# EAGLE board Merge (EAGLE 9.5.1), part 1 of 2
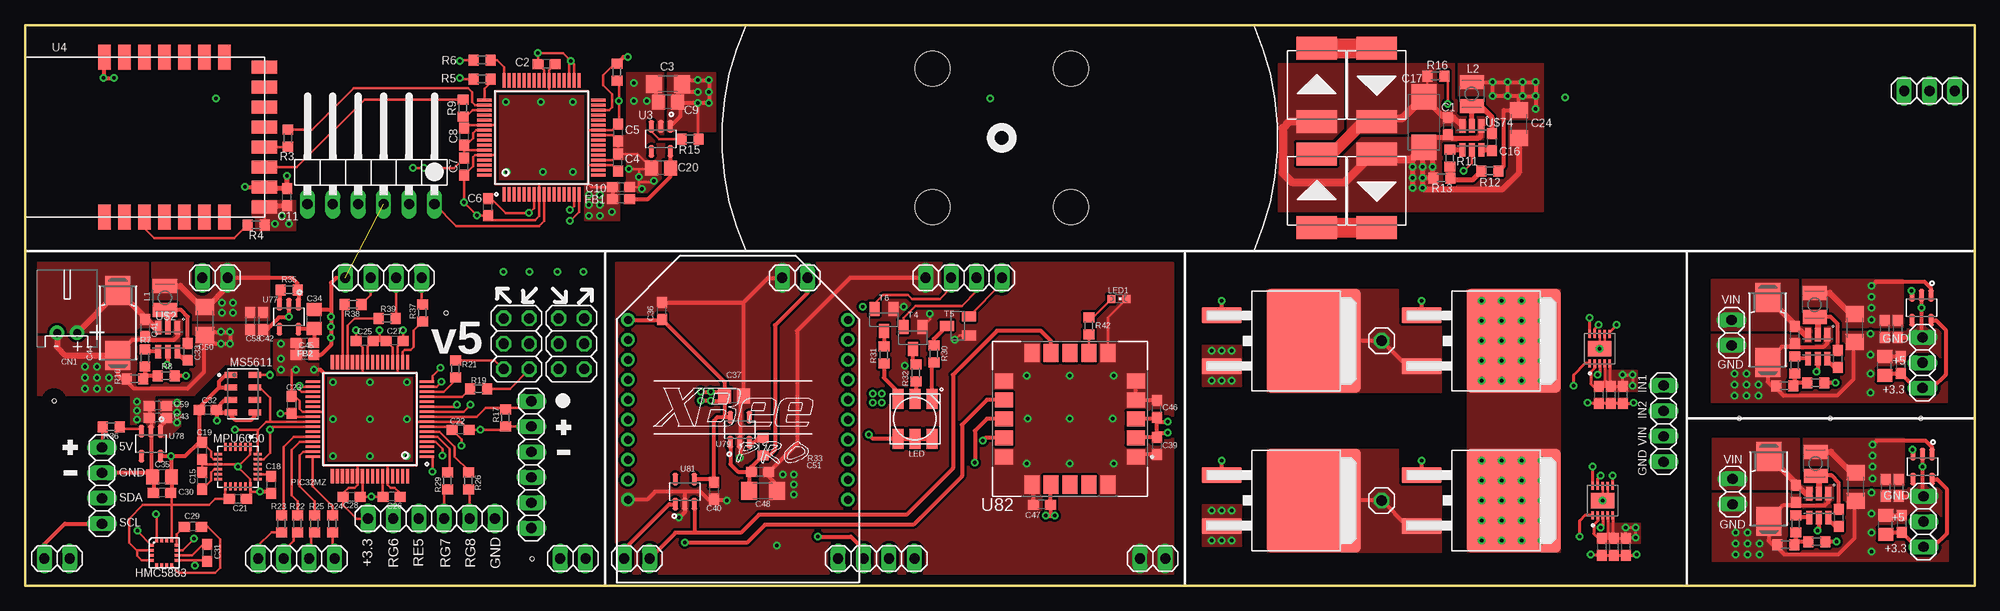
[diagram p0: board, top side]
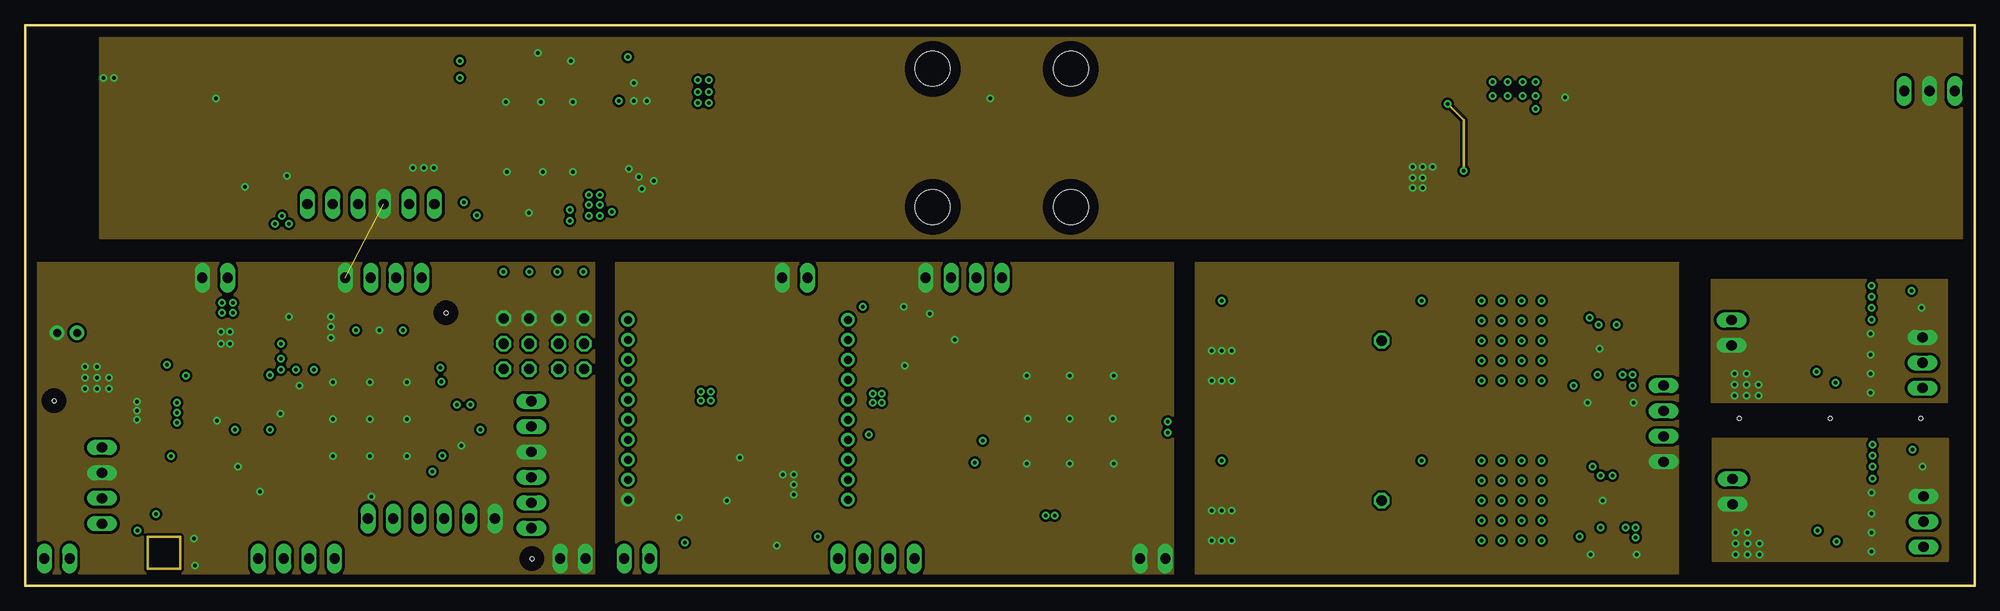
[diagram p1: board, inner layer GND]
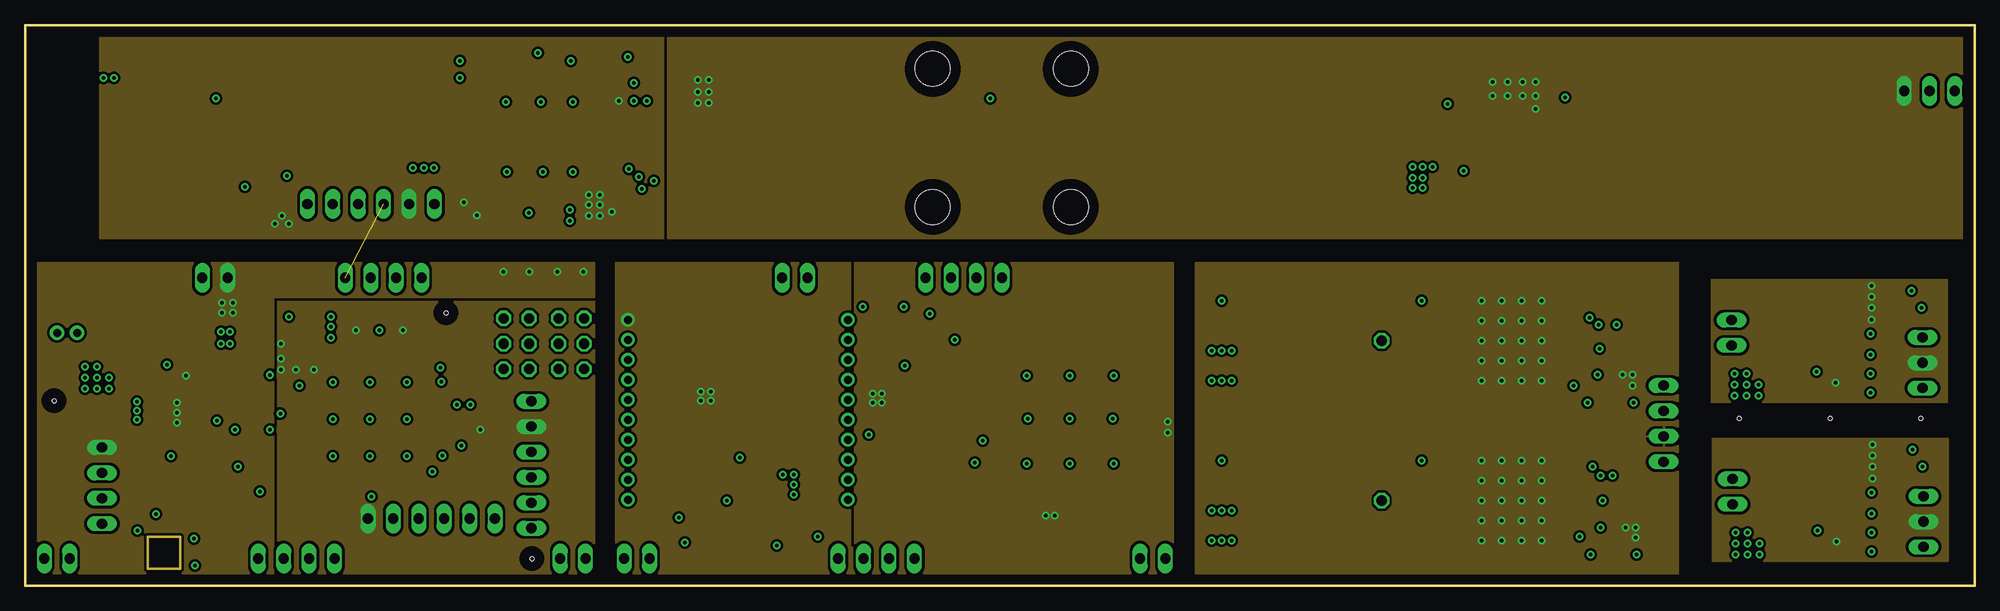
[diagram p2: board, inner layer 5V]
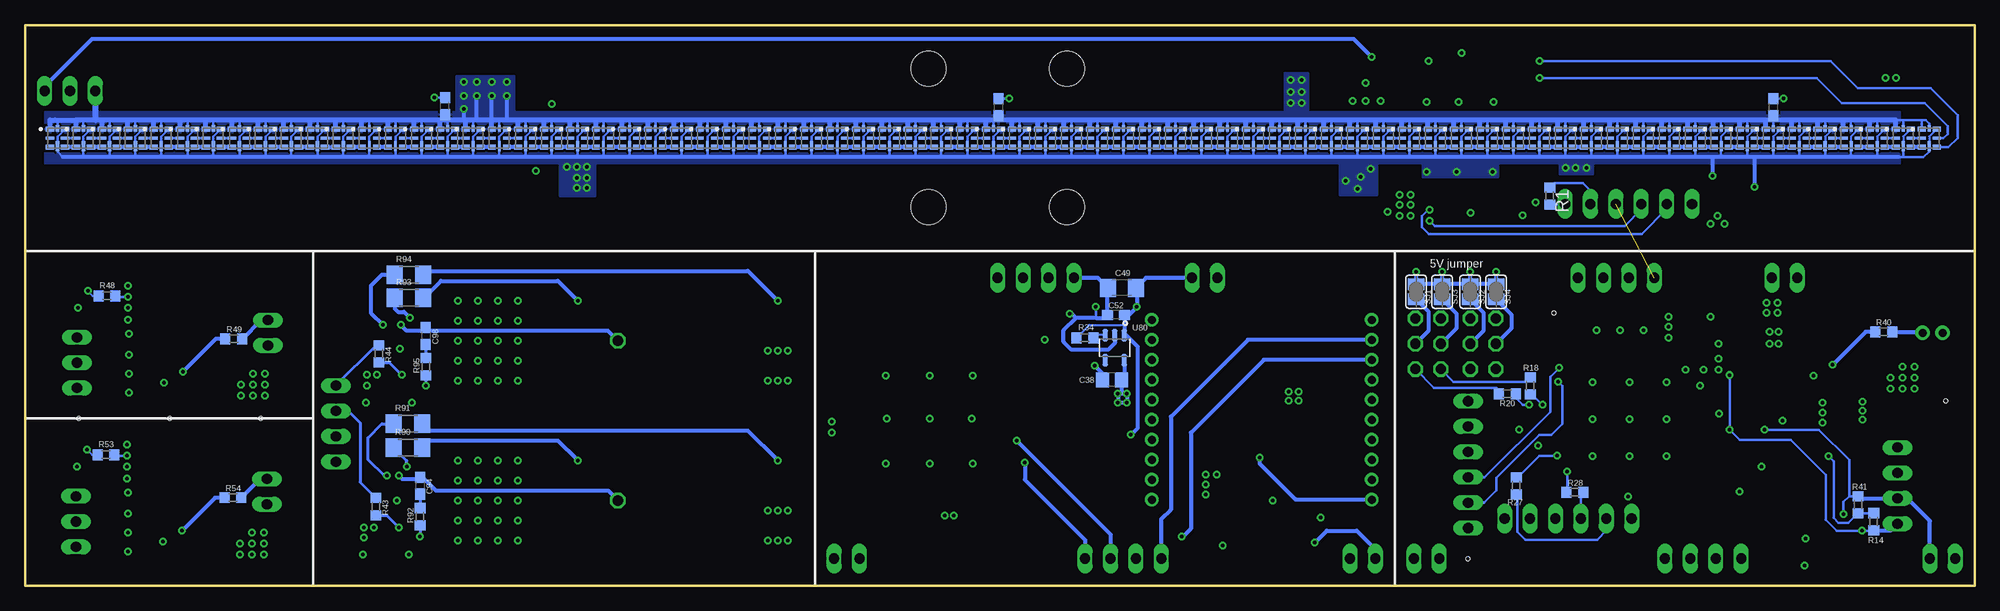
[diagram p3: board, bottom side, seen from below]

Size 195 x 56.1 mm. Coordinates in mm from the lower left corner, seen from the top.
Outline: 0,56.1 195,56.1 195,0 0,0 0,56.1
Copper layers (1+2*15+16): Top 0.035mm / dielectric 1.5mm / GND 0.035mm / dielectric 0.15mm / 5V 0.035mm / dielectric 0.2mm / Bottom 0.035mm
Design rules "default *": minimum track width 0.1mm, minimum drill 12mil, track to track 4mil, track to pad 4mil, pad to pad 4mil, via to via 4mil, smd to smd 4mil, copper to edge 40mil, drill to drill 8mil, minimum pad ring 10mil, minimum via ring 8mil, stop-mask expansion 4mil, vias tented up to drill 0mil, thermal gap 10mil
Holes 3.51 mm at 104.61,51.71 90.79,37.89 104.61,37.89 90.79,51.71
Holes 0.4 mm at 50.7,2.7 42.1,27.3 2.9,18.5 180.55,16.75 189.6,16.75 171.45,16.75

## Footprints (pad centres in the part's own frame; a part is rotated, then mirrored left to right if it is on the bottom)
C0603 = smd 1.1 x 1: 1 -0.85,0; 2 0.85,0
C1206 = smd 1.6 x 1.8: 1 -1.4,0; 2 1.4,0
C0805 = smd 1.3 x 1.5: 1 -0.95,0; 2 0.95,0
C/6032-28R = smd 2.55 x 2.5: + 2.525,0; - -2.525,0
085CS_1AR = smd 2.9 x 2.5: + 3.25,0; - -3.25,0
JST-PH-2-THM-RA = drill 0.8 pad 1.422: 1 1,0; 2 -1,0
DO-214AB = smd 2.286 x 4.064: 1 -3.683,0; 2 3.683,0
1X04 = drill 1.016 long: 1 -3.81,0; 2 -1.27,0; 3 1.27,0; 4 3.81,0
1X02 = drill 1.016 long: 1 -1.27,0; 2 1.27,0
1X03 = drill 1.016 long: 1 -2.54,0; 2 0,0; 3 2.54,0
0603 = smd 1.1 x 1: 1 -0.85,0; 2 0.85,0
LPCC-16 = smd 0.45 x 0.3: 1 -1.275,0.75; 2 -1.275,0.25; 3 -1.275,-0.25; 4 -1.275,-0.75; 9 1.275,-0.75; 10 1.275,-0.25; 11 1.275,0.25; 12 1.275,0.75 | smd 0.3 x 0.45: 5 -0.75,-1.275; 6 -0.25,-1.275; 7 0.25,-1.275; 8 0.75,-1.275; 13 0.75,1.275; 14 0.25,1.275; 15 -0.25,1.275; 16 -0.75,1.275
1X06/90 = drill 1.016 long: 1 -6.35,-3.81; 2 -3.81,-3.81; 3 -1.27,-3.81; 4 1.27,-3.81; 5 3.81,-3.81; 6 6.35,-3.81
2X03 = drill 1.016 octagon: 1 -2.54,-1.27; 2 -2.54,1.27; 3 0,-1.27; 4 0,1.27; 5 2.54,-1.27; 6 2.54,1.27
1X06 = drill 1.016 long: 1 -6.35,0; 2 -3.81,0; 3 -1.27,0; 4 1.27,0; 5 3.81,0; 6 6.35,0
1X01 = drill 1.016 octagon: 1 0,0
L2825P = smd 1.4 x 2.4: 1 -1.2,0; 2 1.2,0
RGBLED5050 = smd 2 x 1.1: 1 -2,1.7; 2 -2,0; 3 -2,-1.7; 4 2,-1.7; 5 2,0; 6 2,1.7
CHIPLED_0603 = smd 0.8 x 0.8: A 0,-0.75; C 0,0.75
QFN50P400X400X95-24N = smd 0.79 x 0.26: 1 -1.97,1.25; 2 -1.97,0.75; 3 -1.97,0.25; 4 -1.97,-0.25; 5 -1.97,-0.75; 6 -1.97,-1.25; 13 1.97,-1.25; 14 1.97,-0.75; 15 1.97,-0.25; 16 1.97,0.25; 17 1.97,0.75; 18 1.97,1.25 | smd 0.26 x 0.79: 7 -1.25,-1.97; 8 -0.75,-1.97; 9 -0.25,-1.97; 10 0.25,-1.97; 11 0.75,-1.97; 12 1.25,-1.97; 19 1.25,1.97; 20 0.75,1.97; 21 0.25,1.97; 22 -0.25,1.97; 23 -0.75,1.97; 24 -1.25,1.97
SON125P500X300X100-8N = smd 1.31 x 0.53: 1 -1.2,1.875; 2 -1.2,0.625; 3 -1.2,-0.625; 4 -1.2,-1.875; 5 1.2,-1.875; 6 1.2,-0.625; 7 1.2,0.625; 8 1.2,1.875
QFP50P1200X1200X120-64N = smd 1.45 x 0.3: 1 -5.7,3.75; 2 -5.7,3.25; 3 -5.7,2.75; 4 -5.7,2.25; 5 -5.7,1.75; 6 -5.7,1.25; 7 -5.7,0.75; 8 -5.7,0.25; 9 -5.7,-0.25; 10 -5.7,-0.75; 11 -5.7,-1.25; 12 -5.7,-1.75; 13 -5.7,-2.25; 14 -5.7,-2.75; 15 -5.7,-3.25; 16 -5.7,-3.75; 33 5.7,-3.75; 34 5.7,-3.25; 35 5.7,-2.75; 36 5.7,-2.25; 37 5.7,-1.75; 38 5.7,-1.25; 39 5.7,-0.75; 40 5.7,-0.25; 41 5.7,0.25; 42 5.7,0.75; 43 5.7,1.25; 44 5.7,1.75; 45 5.7,2.25; 46 5.7,2.75; 47 5.7,3.25; 48 5.7,3.75 | smd 0.3 x 1.45: 17 -3.75,-5.7; 18 -3.25,-5.7; 19 -2.75,-5.7; 20 -2.25,-5.7; 21 -1.75,-5.7; 22 -1.25,-5.7; 23 -0.75,-5.7; 24 -0.25,-5.7; 25 0.25,-5.7; 26 0.75,-5.7; 27 1.25,-5.7; 28 1.75,-5.7; 29 2.25,-5.7; 30 2.75,-5.7; 31 3.25,-5.7; 32 3.75,-5.7; 49 3.75,5.7; 50 3.25,5.7; 51 2.75,5.7; 52 2.25,5.7; 53 1.75,5.7; 54 1.25,5.7; 55 0.75,5.7; 56 0.25,5.7; 57 -0.25,5.7; 58 -0.75,5.7; 59 -1.25,5.7; 60 -1.75,5.7; 61 -2.25,5.7; 62 -2.75,5.7; 63 -3.25,5.7; 64 -3.75,5.7
R0603 = smd 1 x 1.1: 1 -0.85,0; 2 0.85,0
R1206 = smd 1.6 x 1.803: 1 -1.422,0; 2 1.422,0
SJ = smd 1.168 x 1.6: 1 -0.762,0; 2 0.762,0
D2PAK_TO263 = smd 4 x 1.6: 1 -6,2.54; 3 -6,-2.54 | smd 9.4 x 10.4: 2 3.2,0
SOT23-EBC = smd 1 x 1.4: B 0.95,-1.1; C 0,1.1; E -0.95,-1.1
LED_3341 = smd 0.8 x 0.5: 1 -0.75,0.9; 3 -0.75,-0.9; 4 0.75,-0.9; 6 0.75,0.9 | smd 0.8 x 0.3: 2 -0.75,0; 5 0.75,0 | smd 0.3 x 1: 7 0,-0.83 | smd 0.3 x 0.66: 8 0,0.965
SOT95P280X145-5N = smd 1.21 x 0.59: 1 -1.255,0.95; 2 -1.255,0; 3 -1.255,-0.95; 4 1.255,-0.95; 5 1.255,0.95
EMB1061 = smd 2.54 x 1.27: P$1 -7.62,5.84; P$2 -7.62,3.84; P$3 -7.62,1.84; P$4 -7.62,-0.16; P$5 -7.62,-2.16; P$6 -7.62,-4.16; P$7 -7.62,-6.16; P$16 8.38,-6.16; P$17 8.38,-4.16; P$18 8.38,-2.16; P$19 8.38,-0.16; P$20 8.38,1.84; P$21 8.38,3.84; P$22 8.38,5.84 | smd 1.27 x 2.54: P$8 -6.62,-10.16; P$9 -4.62,-10.16; P$10 -2.62,-10.16; P$11 -0.62,-10.16; P$12 1.38,-10.16; P$13 3.38,-10.16; P$14 5.38,-10.16; P$15 7.38,-10.16
XCVR_SAM-M8Q = smd 1.8 x 1.5: 1 -6.6,3.8; 2 -6.6,1.9; 3 -6.6,0; 4 -6.6,-1.9; 5 -6.6,-3.8; 11 6.6,-3.8; 12 6.6,-1.9; 13 6.6,0; 14 6.6,1.9; 15 6.6,3.8 | smd 1.5 x 1.8: 6 -3.8,-6.6; 7 -1.9,-6.6; 8 0,-6.6; 9 1.9,-6.6; 10 3.8,-6.6; 16 3.8,6.6; 17 1.9,6.6; 18 0,6.6; 19 -1.9,6.6; 20 -3.8,6.6
10-VFDFN = smd 0.74 x 0.3: 1 -1.47,1; 2 -1.47,0.5; 3 -1.47,0; 4 -1.47,-0.5; 5 -1.47,-1; 6 1.47,-1; 7 1.47,-0.5; 8 1.47,0; 9 1.47,0.5; 10 1.47,1 | smd 1.57 x 2.39: 11 0,0
SOT95P280X140-6N = smd 1.35 x 0.6: 1 -1.185,0.95; 2 -1.185,0; 3 -1.185,-0.95; 4 1.185,-0.95; 5 1.185,0; 6 1.185,0.95
XBEE-PRO = drill 0.8 pad 1.27: 1 -11,9; 2 -11,7; 3 -11,5; 4 -11,3; 5 -11,1; 6 -11,-1; 7 -11,-3; 8 -11,-5; 9 -11,-7; 10 -11,-9; 11 11,-9; 12 11,-7; 13 11,-5; 14 11,-3; 15 11,-1; 16 11,1; 17 11,3; 18 11,5; 19 11,7; 20 11,9

## Placement (x,y rotation side)
C1  0.1uF  [C0603]  142.3,46 270 top
C2  0.1uF  [C0603]  52.15,52.2 180 top
C3  10uF  [C1206]  64.3,50.2 180 top
C4  0.1uF  [C0603]  59.3,42.35 90 top
C5  0.1uF  [C0603]  59.3,45.35 270 top
C6  0.1uF  [C0603]  46.3,37.9 90 top
C7  0.1uF  [C0603]  43.9,41.95 90 top
C8  0.1uF  [C0603]  43.9,44.95 270 top
C9  [C0805]  64.3,48.4 180 top
C10  0.1uF  [C0603]  59.6,39.9 0 top
C11  0.1uF  [C0603]  26.2,38.9 90 top
C12  0.1uF  [C0603]  20.1,47.9 90 bottom
C13  0.1uF  [C0603]  97.6,47.9 90 bottom
C14  0.1uF  [C0603]  153,48 90 bottom
C15  0.1uF  [C0603]  17.7,10.5 90 top
C16  0.1uF  [C0603]  146.7,44.4 270 top
C17  [C/6032-28R]  139.9,46.4 90 top
C18  2.2nF  [C0603]  24.6,10.1 270 top
C19  10nF  [C0603]  17.7,13.5 270 top
C20  1uF  [C0805]  63.6,41.8 180 top
C21  0.1uF  [C0603]  21.3,8.7 0 top
C22  0.1uF  [C0603]  43.55,15.6 180 top
C23  0.1uF  [C0603]  26.65,18.1 270 top
C24  10uF  [C1206]  149.4,46.2 270 top
C25  0.1uF  [C0603]  33.95,24.5 0 top
C26  0.1uF  [C0603]  36.65,8.9 180 top
C27  0.1uF  [C0603]  36.95,24.5 180 top
C28  0.1uF  [C0603]  32.65,8.9 0 top
C29  0.22uF  [C0603]  16.8,5.9 180 top
C30  0.1uF  [C0603]  13.7,9.3 180 top
C31  4.7uF  [C0603]  18.2,3.3 270 top
C32  0.1uF  [C0603]  18.3,17.6 0 top
C33  0.1uF  [C0603]  16.3,23.4 270 top
C34  1uF  [C0805]  28.9,26.7 90 top
C35  1uF  [C0805]  13.7,10.9 180 top
C36  0.1uF  [C0603]  63.7,27.5 90 top
C37  1uF  [C0805]  70.9,19 0 top
C38  1uF  [C0805]  86.3,20.6 180 bottom
C39  0.1uF  [C0603]  113.2,14 270 top
C40  0.1uF  [C0603]  68.9,9.5 270 top
C41  0.1uF  [C0603]  12,25.8 270 top
C42  0.1uF  [C0603]  23.8,26.5 270 top
C43  0.1uF  [C0603]  13.3,16.8 180 top
C44  [085CS_1AR]  9.3,26.3 90 top
C45  0.1uF  [C0603]  28,23.1 0 top
C46  0.1uF  [C0603]  113.2,17.7 90 top
C47  0.1uF  [C0603]  101.7,8.1 180 top
C48  10uF  [C1206]  73.8,9.5 0 top
C49  10uF  [C1206]  85.3,29.8 180 bottom
C50  10uF  [C1206]  18,26.5 270 top
C51  0.1uF  [C0603]  73.5,11.4 0 top
C52  0.1uF  [C0603]  85.9,27.1 180 bottom
C53  0.1uF  [C0603]  181.3,22.7 270 top
C54  1uF  [C0805]  186,22 90 top
C55  0.1uF  [C0603]  177,25.1 270 top
C56  0.1uF  [C0603]  187.3,25.7 270 top
C57  [085CS_1AR]  174.3,25.6 90 top
C58  0.1uF  [C0603]  22.5,26.5 270 top
C59  0.1uF  [C0603]  13.3,18 180 top
C60  0.1uF  [C0603]  187.6,22.1 270 top
C61  10uF  [C1206]  183,25.8 270 top
C62  0.1uF  [C0603]  186,25.7 270 top
C63  0.1uF  [C0603]  181.4,6.8 270 top
C64  1uF  [C0805]  186.1,6.1 90 top
C65  0.1uF  [C0603]  177.1,9.2 270 top
C66  0.1uF  [C0603]  187.4,9.8 270 top
C67  [085CS_1AR]  174.4,9.7 90 top
C68  0.1uF  [C0603]  187.7,6.2 270 top
C69  10uF  [C1206]  183.1,9.9 270 top
C70  0.1uF  [C0603]  186.1,9.8 270 top
C91  [C0603]  158.6,19.1 270 top
C92  [C0603]  157.4,19.1 270 top
C93  [C0603]  160.1,3.9 270 top
C94  [C0603]  155.5,10 270 bottom
C95  [C0603]  157.7,3.9 270 top
C96  [C0603]  159.8,19.1 270 top
C97  [C0603]  158.9,3.9 270 top
C98  [C0603]  154.9,25 270 bottom
CN1  [JST-PH-2-THM-RA]  4.2,25.3 0 top
D2  SMD-DIODE-SCHOTTKY-40V-3A(DO-214AB)  [DO-214AB]  129.2,39.5 90 top
D3  SMD-DIODE-SCHOTTKY-40V-3A(DO-214AB)  [DO-214AB]  135.2,50.1 270 top
D4  SMD-DIODE-SCHOTTKY-40V-3A(DO-214AB)  [DO-214AB]  129.2,50.1 90 top
D5  SMD-DIODE-SCHOTTKY-40V-3A(DO-214AB)  [DO-214AB]  135.2,39.5 270 top
E$1  [1X04]  163.9,16.2 90 top
E$2  [1X02]  170.7,25.3 90 top
E$3  [1X03]  189.8,22.3 270 top
E$4  [1X02]  170.8,9.4 90 top
E$5  [1X03]  189.9,6.4 270 top
FB1  30Ω/1.8A  [0603]  59.6,38.7 180 top
FB2  30Ω/1.8A  [0603]  28,24.3 180 top
HMC5883  HMC5883L  [LPCC-16]  13.9,3.3 0 top
JP1  [1X06/90]  34.6,42 0 top
JP2  [1X03]  190.5,49.5 0 top
JP3  [1X02]  3.2,2.7 180 top
JP4  [2X03]  49.15,24.2 90 top
JP5  [2X03]  54.65,24.2 90 top
JP6  [1X04]  85.15,2.7 0 top
JP7  [1X04]  7.7,10 90 top
JP8  [1X04]  93.9,30.8 180 top
JP9  [1X04]  35.85,30.8 180 top
JP10  [1X02]  19,30.8 180 top
JP11  [1X04]  27.15,2.7 0 top
JP12  [1X02]  61.2,2.7 180 top
JP13  [1X02]  77,30.8 180 top
JP14  [1X02]  112.8,2.7 0 top
JP15  [1X02]  54.8,2.7 0 top
JP16  [1X06]  40.65,6.7 180 top
JP17  [1X06]  50.65,12.1 270 top
JP29  [1X01]  135.7,8.5 180 top
JP30  [1X01]  135.7,24.5 180 top
L1  4.7uH  [L2825P]  14,28.8 270 top
L2  4.7uH  [L2825P]  144.7,49.2 270 top
L3  4.7uH  [L2825P]  179,28.1 270 top
L4  4.7uH  [L2825P]  179.1,12.2 270 top
LED  RGBLED5050  [RGBLED5050]  89,16.7 90 top
LED1  [CHIPLED_0603]  109.4,28.7 270 top
MPU6050  MPU-6050  [QFN50P400X400X95-24N]  21.3,11.9 270 top
MS5611  MS561101BA03-50  [SON125P500X300X100-8N]  21.8,19.2 0 top
PIC32MZ  PIC32MZ2048EFH064-I/PT  [QFP50P1200X1200X120-64N]  34.5,16.65 180 top
R1  [R0603]  42.5,39 270 bottom
R2  [R0603]  59.2,51.4 90 top
R3  [R0603]  26.3,44.8 270 top
R4  [R0603]  23.1,36.1 180 top
R5  [R0603]  45.7,50.7 180 top
R6  [R0603]  45.7,52.6 180 top
R7  75k  [R0603]  12,22.8 270 top
R8  41k  [R0603]  14.1,21 0 top
R9  [R0603]  43.8,47.8 90 top
R10  7.6k  [R0603]  11,20.7 0 top
R11  75k  [R0603]  142.5,42.8 270 top
R12  41k  [R0603]  146.5,41.5 0 top
R13  7.6k  [R0603]  141.7,40.8 0 top
R14  4.7k  [R0603]  10.1,6.4 90 bottom
R15  75k  [R0603]  66.5,44.7 180 top
R16  20k  [R0603]  141.1,51 180 top
R17  1k  [R0603]  48.05,16.8 270 top
R18  33  [R0603]  44.45,20 90 bottom
R19  33  [R0603]  45.35,19.7 0 top
R20  33  [R0603]  46.75,19.2 180 bottom
R21  33  [R0603]  43.05,21.7 90 top
R22  33  [R0603]  27.25,6.2 90 top
R23  33  [R0603]  25.65,6.2 90 top
R24  33  [R0603]  30.75,6.2 90 top
R25  33  [R0603]  28.95,6.2 90 top
R26  33  [R0603]  44.35,10.5 270 top
R27  33  [R0603]  45.85,10 270 bottom
R28  33  [R0603]  40,9.35 0 bottom
R29  33  [R0603]  42.25,10.5 270 top
R30  330  [R0603]  90.9,23.2 270 top
R31  330  [R0603]  85.9,23.1 270 top
R32  220  [R0603]  89.1,21.3 270 top
R33  10k  [R0603]  73.8,13.9 270 top
R34  10k  [R0603]  89,24.8 180 bottom
R35  10k  [R0603]  26.4,29.6 0 top
R36  10k  [R0603]  8.6,15.9 180 top
R37  33  [R0603]  39.75,27.3 90 top
R38  33  [R0603]  32.8,28.15 0 top
R39  33  [R0603]  36.2,26.75 0 top
R40  10k  [R0603]  9.1,25.4 0 bottom
R41  4.7k  [R0603]  11.65,8.1 270 bottom
R42  1k  [R0603]  106.4,26 270 top
R43  [R0603]  159.9,7.9 270 bottom
R44  [R0603]  159.6,23.2 270 bottom
R45  75k  [R0603]  177,22.1 270 top
R46  41k  [R0603]  179.1,20.3 0 top
R47  7.6k  [R0603]  176,20 0 top
R48  10k  [R0603]  186.8,29 0 bottom
R49  10k  [R0603]  174.1,24.7 0 bottom
R50  75k  [R0603]  177.1,6.2 270 top
R51  41k  [R0603]  179.2,4.4 0 top
R52  7.6k  [R0603]  176.1,4.1 0 top
R53  10k  [R0603]  186.9,13.1 0 bottom
R54  10k  [R0603]  174.2,8.8 0 bottom
R90  [R1206]  156.7,13.8 0 bottom
R91  [R1206]  156.7,16.2 0 bottom
R92  [R0603]  155.5,6.9 90 bottom
R93  [R1206]  156.6,28.8 0 bottom
R94  [R1206]  156.6,31.1 0 bottom
R95  [R0603]  154.9,21.9 90 bottom
SJ1  [SJ]  55.85,29.4 90 bottom
SJ2  [SJ]  50.45,29.4 90 bottom
SJ3  [SJ]  53.25,29.4 90 bottom
SJ4  [SJ]  47.85,29.4 90 bottom
T1  [D2PAK_TO263]  145.7,8.5 0 top
T2  [D2PAK_TO263]  125.7,24.5 0 top
T3  [D2PAK_TO263]  145.7,24.5 0 top
T4  [SOT23-EBC]  88.8,24.8 180 top
T5  [SOT23-EBC]  93.3,26 90 top
T6  [SOT23-EBC]  85.9,26.6 180 top
T7  [D2PAK_TO263]  125.7,8.5 0 top
U1  PIC32MZ2048EFH064-I/PT  [QFP50P1200X1200X120-64N]  51.65,44.85 90 top
U2  3341  [LED_3341]  4.55,44.8 0 bottom
U3  TLV75533PDBVR  [SOT95P280X145-5N]  63.6,44.7 270 top
U4  EMB1061  [EMB1061]  13.8,44.5 90 top
U5  3341  [LED_3341]  7.15,44.8 0 bottom
U6  3341  [LED_3341]  9.75,44.8 0 bottom
U7  3341  [LED_3341]  12.35,44.8 0 bottom
U8  3341  [LED_3341]  14.95,44.8 0 bottom
U9  3341  [LED_3341]  17.55,44.8 0 bottom
U10  3341  [LED_3341]  20.15,44.8 0 bottom
U11  3341  [LED_3341]  22.75,44.8 0 bottom
U12  3341  [LED_3341]  25.35,44.8 0 bottom
U13  3341  [LED_3341]  27.95,44.8 0 bottom
U14  3341  [LED_3341]  30.55,44.8 0 bottom
U15  3341  [LED_3341]  33.15,44.8 0 bottom
U16  3341  [LED_3341]  38.35,44.8 0 bottom
U17  3341  [LED_3341]  35.75,44.8 0 bottom
U18  3341  [LED_3341]  40.95,44.8 0 bottom
U19  3341  [LED_3341]  43.55,44.8 0 bottom
U20  3341  [LED_3341]  46.15,44.8 0 bottom
U21  3341  [LED_3341]  48.75,44.8 0 bottom
U22  3341  [LED_3341]  51.35,44.8 0 bottom
U23  3341  [LED_3341]  53.95,44.8 0 bottom
U24  3341  [LED_3341]  56.55,44.8 0 bottom
U25  3341  [LED_3341]  59.15,44.8 0 bottom
U26  3341  [LED_3341]  61.75,44.8 0 bottom
U27  3341  [LED_3341]  64.35,44.8 0 bottom
U28  3341  [LED_3341]  66.95,44.8 0 bottom
U29  3341  [LED_3341]  72.15,44.8 0 bottom
U30  3341  [LED_3341]  69.55,44.8 0 bottom
U31  3341  [LED_3341]  74.75,44.8 0 bottom
U32  3341  [LED_3341]  77.35,44.8 0 bottom
U33  3341  [LED_3341]  79.95,44.8 0 bottom
U34  3341  [LED_3341]  82.55,44.8 0 bottom
U35  3341  [LED_3341]  85.15,44.8 0 bottom
U36  3341  [LED_3341]  87.75,44.8 0 bottom
U37  3341  [LED_3341]  90.35,44.8 0 bottom
U38  3341  [LED_3341]  92.95,44.8 0 bottom
U39  3341  [LED_3341]  95.55,44.8 0 bottom
U40  3341  [LED_3341]  98.15,44.8 0 bottom
U41  3341  [LED_3341]  100.75,44.8 0 bottom
U42  3341  [LED_3341]  105.95,44.8 0 bottom
U43  3341  [LED_3341]  103.35,44.8 0 bottom
U44  3341  [LED_3341]  108.55,44.8 0 bottom
U45  3341  [LED_3341]  111.15,44.8 0 bottom
U46  3341  [LED_3341]  113.75,44.8 0 bottom
U47  3341  [LED_3341]  116.35,44.8 0 bottom
U48  3341  [LED_3341]  118.95,44.8 0 bottom
U49  3341  [LED_3341]  121.55,44.8 0 bottom
U50  3341  [LED_3341]  124.15,44.8 0 bottom
U51  3341  [LED_3341]  126.75,44.8 0 bottom
U52  3341  [LED_3341]  129.35,44.8 0 bottom
U53  3341  [LED_3341]  131.95,44.8 0 bottom
U54  3341  [LED_3341]  134.55,44.8 0 bottom
U55  3341  [LED_3341]  139.75,44.8 0 bottom
U56  3341  [LED_3341]  137.15,44.8 0 bottom
U57  3341  [LED_3341]  142.35,44.8 0 bottom
U58  3341  [LED_3341]  144.95,44.8 0 bottom
U59  3341  [LED_3341]  147.55,44.8 0 bottom
U60  3341  [LED_3341]  150.15,44.8 0 bottom
U61  3341  [LED_3341]  152.75,44.8 0 bottom
U62  3341  [LED_3341]  155.35,44.8 0 bottom
U63  3341  [LED_3341]  157.95,44.8 0 bottom
U64  3341  [LED_3341]  160.55,44.8 0 bottom
U65  3341  [LED_3341]  163.15,44.8 0 bottom
U66  3341  [LED_3341]  165.75,44.8 0 bottom
U67  3341  [LED_3341]  168.35,44.8 0 bottom
U68  3341  [LED_3341]  173.55,44.8 0 bottom
U69  3341  [LED_3341]  170.95,44.8 0 bottom
U70  3341  [LED_3341]  176.15,44.8 0 bottom
U71  3341  [LED_3341]  178.75,44.8 0 bottom
U72  3341  [LED_3341]  181.35,44.8 0 bottom
U73  3341  [LED_3341]  183.95,44.8 0 bottom
U74  3341  [LED_3341]  186.55,44.8 0 bottom
U75  3341  [LED_3341]  189.15,44.8 0 bottom
U76  3341  [LED_3341]  191.75,44.8 0 bottom
U77  TLV75533PDBVR  [SOT95P280X145-5N]  26.4,26.9 270 top
U78  TLV75533PDBVR  [SOT95P280X145-5N]  12.6,14.2 270 top
U79  TLV75533PDBVR  [SOT95P280X145-5N]  71.5,15.6 90 top
U80  TLV75533PDBVR  [SOT95P280X145-5N]  86,23.8 270 bottom
U81  CAT24C02  [SOT95P280X145-5N]  66,9.4 90 top
U82  SAM-M8Q  [XCVR_SAM-M8Q]  104.5,16.7 180 top
U83  TLV75533PDBVR  [SOT95P280X145-5N]  189.7,27.8 270 top
U84  TLV75533PDBVR  [SOT95P280X145-5N]  189.8,11.9 270 top
U90  CHL8510CRT  [10-VFDFN]  157.8,8.5 90 top
U91  CHL8510CRT  [10-VFDFN]  157.5,23.7 90 top
U$1  AP65211A  [SOT95P280X140-6N]  179.3,23.9 270 top
U$2  AP65211A  [SOT95P280X140-6N]  14.3,24.6 270 top
U$3  AP65211A  [SOT95P280X140-6N]  179.4,8 270 top
U$74  AP65211A  [SOT95P280X140-6N]  144.7,44.8 270 top
XB2  XBEE-PRO  [XBEE-PRO]  71.3,17.6 0 top

## Library data of the parts
C1-C8 C10-C70 C91-C98 = rcl; SPICEPREFIX: C
C9 R1-R6 R9 = resistor
CN1 LED LED1 = adafruit
D2-D5 = SMD-DIODE-SCHOTTKY-40V-3A_DO-214AB_; AVAILABILITY: Good; DESCRIPTION: Rectifier%2C Schottky%3B DO-214AB%3B 3.0A IF%3B 0.75V%3B 40V%3B 100A IFRM%3B 10000V/us%3B 1000pF; MF: Vishay; MP: SS34-E3/57T; PACKAGE: DO-214 Vishay; PRICE: 0.24 USD
E$1-E$5 JP1-JP17 JP29 JP30 = pinhead
FB1 FB2 = SparkFun-Coils; PROD_ID: NDUC-07859
HMC5883 = HMC5883L; AVAILABILITY: Unavailable; DESCRIPTION: Digital Compass +/- 0.8g, Lcc-16; MF: Honeywell Aerospace; MP: HMC5883L-T; PACKAGE: LCC-16 Honeywell; PRICE: None
L1-L4 = rcl; SPICEPREFIX: L
MPU6050 = MPU-6050; AVAILABILITY: Unavailable; DESCRIPTION: 3-axis gyroscope, 3-axis accelerometer in a 4x4x0.9 housing; MF: TDK InvenSense; MP: MPU-6050; PACKAGE: QFN-24 InvenSense; PRICE: None
MS5611 = MS561101BA03-50; AVAILABILITY: Unavailable; DESCRIPTION: Pressure Sensor 1.44V to 3.6V 0.01bar to 1.2bar Absolute 8-Pin QFN T/R; MF: TE Connectivity; MP: MS561101BA03-50; PACKAGE: SMD-8 Measurement Specialties; PRICE: None
PIC32MZ = PIC32MZ2048EFH064-I_PT; DESCRIPTION: PIC32MZ Series 2 MB Flash 512 kB RAM 200 MHz 32-Bit Microcontroller - TQFP-64; DIGI-KEY_PART_NUMBER: PIC32MZ2048EFH064-I/PT-ND; DIGI-KEY_PURCHASE_URL: https://www.digikey.com/product-detail/en/microchip-technology/PIC32MZ2048EFH064-I-PT/PIC32MZ2048EFH064-I-PT-ND/5323563?utm_source=snapeda&utm_medium=aggregator&utm_campaign=symbol; MF: Microchip; MP: PIC32MZ2048EFH064-I/PT; PACKAGE: TQFP-64 Microchip
R7 R8 R10-R54 R90-R95 = rcl; SPICEPREFIX: R
SJ1-SJ4 = jumper
T1-T3 T7 = we-transistor
T4-T6 = transistor
U1 = PIC32MZ2048EFH064-I_PT; AVAILABILITY: Good; DESCRIPTION: PIC32MZ Series 2 MB Flash 512 kB RAM 200 MHz 32-Bit Microcontroller - TQFP-64; MF: Microchip; MP: PIC32MZ2048EFH064-I/PT; PACKAGE: TQFP-64 Microchip; PRICE: 11.29 USD
U2 U5-U76 = APA102; AVAILABILITY: Unavailable; DESCRIPTION: APA102-2020-256-8 is a type ic for the three-color RGB Diming control strip and string.; MF: Adafruit Industries; MP: APA-102-2020-256-8; PACKAGE: SOIC-20 Adafruit Industries; PRICE: None
U3 U77-U80 U83 U84 = TLV75533PDBVR; AVAILABILITY: Unavailable; DESCRIPTION: 500mA Low-IQ Small-Size Low-Dropout _LDO_ Regulator 5-SOT-23 -40 to 125; MF: Texas Instruments; MP: TLV75533PDBVR; PACKAGE: SOT-23 Texas Instruments; PRICE: None
U4 = EMB1061; AVAILABILITY: Unavailable; DESCRIPTION: u-Blox M8 Gnss Antenna Module; MF: U-Blox America; MP: SAM-M8Q; PACKAGE: SMD-20 U-Blox America; PRICE: None
U81 = CAT24C02; AVAILABILITY: Unavailable; DESCRIPTION: 500mA Low-IQ Small-Size Low-Dropout _LDO_ Regulator 5-SOT-23 -40 to 125; MF: Texas Instruments; MP: TLV75533PDBVR; PACKAGE: SOT-23 Texas Instruments; PRICE: None
U82 = SAM-M8Q; AVAILABILITY: Unavailable; DESCRIPTION: u-Blox M8 Gnss Antenna Module; MF: U-Blox America; MP: SAM-M8Q; PACKAGE: SMD-20 U-Blox America; PRICE: None
U90 U91 = CHL8510CRT; AVAILABILITY: Unavailable; DESCRIPTION: Dc-Dc Conv, Buck/Boost, 1mhz, Wdfn-10; MF: Richtek USA; MP: RT6150AGQW; PACKAGE: WFDFN-10 Richtek; PRICE: None
U$1-U$3 U$74 = SOT95P280X140-6N
XB2 = maxstream; MPN: XBP24-AWI-001; OC_FARNELL: 1337916; OC_NEWARK: 42M2667

## Nets
+3V1: C22.1 C23.1 C25.1 C26.1 C27.1 C28.1 C45.1 FB2.2 JP16.6 JP17.2 PIC32MZ.8 PIC32MZ.19 PIC32MZ.26 PIC32MZ.39 PIC32MZ.54 PIC32MZ.60 R17.2
+3V3: C2.1 C4.1 C5.1 C6.1 C7.1 C8.1 C10.1 C11.1 FB1.2 JP1.5 R1.1 R2.1 R4.1 U1.8 U1.19 U1.26 U1.39 U1.54 U1.60 U4.P$8
+5V: C3.1 C9.1 C12.1 C13.1 C14.1 C24.1 JP2.1 L2.1 R12.2 R15.1 U2.1 U2.8 U3.1 U5.1 U5.8 U6.1 U6.8 U7.1 U7.8 U8.1 U8.8 U9.1 U9.8 U10.1 U10.8 U11.1 U11.8 U12.1 U12.8 U13.1 U13.8 U14.1 U14.8 U15.1 U15.8 U16.1 U16.8 U17.1 U17.8 U18.1 U18.8 U19.1 U19.8 U20.1 U20.8 U21.1 U21.8 U22.1 U22.8 U23.1 U23.8 U24.1 U24.8 U25.1 U25.8 U26.1 U26.8 U27.1 U27.8 U28.1 U28.8 U29.1 U29.8 U30.1 U30.8 U31.1 U31.8 U32.1 U32.8 U33.1 U33.8 U34.1 U34.8 U35.1 U35.8 U36.1 U36.8 U37.1 U37.8 U38.1 U38.8 U39.1 U39.8 U40.1 U40.8 U41.1 U41.8 U42.1 U42.8 U43.1 U43.8 U44.1 U44.8 U45.1 U45.8 U46.1 U46.8 U47.1 U47.8 U48.1 U48.8 U49.1 U49.8 U50.1 U50.8 U51.1 U51.8 U52.1 U52.8 U53.1 U53.8 U54.1 U54.8 U55.1 U55.8 U56.1 U56.8 U57.1 U57.8 U58.1 U58.8 U59.1 U59.8 U60.1 U60.8 U61.1 U61.8 U62.1 U62.8 U63.1 U63.8 U64.1 U64.8 U65.1 U65.8 U66.1 U66.8 U67.1 U67.8 U68.1 U68.8 U69.1 U69.8 U70.1 U70.8 U71.1 U71.8 U72.1 U72.8 U73.1 U73.8 U74.1 U74.8 U75.1 U75.8 U76.1 U76.8
+5V1: C42.1 C43.1 C50.1 C58.1 C59.1 JP7.4 JP10.1 L1.1 R8.2 R35.2 R36.2 SJ1.2 SJ2.2 SJ3.2 SJ4.2 U77.1 U78.1
+5V2: C56.1 C61.1 C62.1 E$3.2 L3.1 R46.2 R48.2 U83.1
+5V3: C66.1 C69.1 C70.1 E$5.2 L4.1 R51.2 R53.2 U84.1
+5V/1: C48.1 C49.1 C51.1 C52.1 JP13.1 LED.1 LED.2 LED.3 R33.2 R34.2 U79.1 U80.1
+12V: C41.1 C44.+ CN1.1 R40.2 U$2.3
+12V1: C55.1 C57.+ E$2.2 R49.2 U$1.3
+12V2: C91.1 C92.1 C93.1 C95.1 C96.1 C97.1 E$1.2 T1.2 T3.2 U90.2 U90.4 U90.5 U91.2 U91.4 U91.5
+12V3: C65.1 C67.+ E$4.2 R54.2 U$3.3
+15V: C1.1 C17.+ D2.2 D3.2 R16.2 U$74.3
BLE_RX: R3.2 U4.P$11
BLE_TX: R9.2 U4.P$10
CKI_1: R5.2 U2.5
DGND: C36.2 C37.2 C38.2 C39.2 C40.2 C46.2 C47.2 C48.2 C49.2 C51.2 C52.2 JP8.4 JP13.2 JP14.1 JP14.2 LED1.C T4.E T5.E T6.E U79.2 U80.2 U81.2 U82.1 U82.4 U82.5 U82.6 U82.10 U82.11 U82.15 U82.16 U82.20 XB2.10
ESC_1: JP5.1 R20.2
ESC_2: JP5.2 R18.2
ESC_3: JP4.1 R19.2
ESC_4: JP4.2 R21.2
GATE_H1: R90.2 T1.1
GATE_H2: R93.2 T3.1
GATE_L1: R91.2 T7.1
GATE_L2: R94.2 T2.1
GND1: C1.2 C2.2 C3.2 C4.2 C5.2 C6.2 C7.2 C8.2 C9.2 C10.2 C11.2 C12.2 C13.2 C14.2 C15.2 C17.- C18.2 C19.2 C20.2 C21.2 C22.2 C23.2 C24.2 C25.2 C26.2 C27.2 C28.2 C30.2 C31.2 C32.2 C34.2 C35.2 C41.2 C42.2 C43.2 C44.- C45.2 C50.2 C58.2 C59.2 CN1.2 D4.1 D5.1 HMC5883.9 HMC5883.11 JP1.4 JP2.2 JP4.5 JP4.6 JP5.5 JP5.6 JP7.3 JP9.4 JP10.2 JP15.1 JP15.2 JP16.1 JP17.3 MPU6050.1 MPU6050.9 MPU6050.18 MS5611.3 MS5611.4 MS5611.5 PIC32MZ.7 PIC32MZ.20 PIC32MZ.25 PIC32MZ.34 PIC32MZ.35 PIC32MZ.40 PIC32MZ.55 PIC32MZ.59 R10.1 R13.1 U1.7 U1.20 U1.25 U1.34 U1.35 U1.40 U1.55 U1.59 U2.6 U2.7 U3.2 U4.P$9 U4.P$22 U5.6 U5.7 U6.6 U6.7 U7.6 U7.7 U8.6 U8.7 U9.6 U9.7 U10.6 U10.7 U11.6 U11.7 U12.6 U12.7 U13.6 U13.7 U14.6 U14.7 U15.6 U15.7 U16.6 U16.7 U17.6 U17.7 U18.6 U18.7 U19.6 U19.7 U20.6 U20.7 U21.6 U21.7 U22.6 U22.7 U23.6 U23.7 U24.6 U24.7 U25.6 U25.7 U26.6 U26.7 U27.6 U27.7 U28.6 U28.7 U29.6 U29.7 U30.6 U30.7 U31.6 U31.7 U32.6 U32.7 U33.6 U33.7 U34.6 U34.7 U35.6 U35.7 U36.6 U36.7 U37.6 U37.7 U38.6 U38.7 U39.6 U39.7 U40.6 U40.7 U41.6 U41.7 U42.6 U42.7 U43.6 U43.7 U44.6 U44.7 U45.6 U45.7 U46.6 U46.7 U47.6 U47.7 U48.6 U48.7 U49.6 U49.7 U50.6 U50.7 U51.6 U51.7 U52.6 U52.7 U53.6 U53.7 U54.6 U54.7 U55.6 U55.7 U56.6 U56.7 U57.6 U57.7 U58.6 U58.7 U59.6 U59.7 U60.6 U60.7 U61.6 U61.7 U62.6 U62.7 U63.6 U63.7 U64.6 U64.7 U65.6 U65.7 U66.6 U66.7 U67.6 U67.7 U68.6 U68.7 U69.6 U69.7 U70.6 U70.7 U71.6 U71.7 U72.6 U72.7 U73.6 U73.7 U74.6 U74.7 U75.6 U75.7 U76.6 U76.7 U77.2 U78.2 U$2.1 U$74.1
GND2: C54.2 C55.2 C56.2 C57.- C60.1 C61.2 C62.2 E$2.1 E$3.1 R47.1 U83.2 U$1.1
GND3: C91.2 C92.2 C93.2 C95.2 C96.2 C97.2 E$1.1 T2.3 T7.3 U90.7 U90.8 U90.11 U91.7 U91.8 U91.11
GND4: C64.2 C65.2 C66.2 C67.- C68.1 C69.2 C70.2 E$4.1 E$5.1 R52.1 U84.2 U$3.1
GPIO1: JP16.5 R27.2
GPIO2: JP16.4 R28.2
GPIO3: JP16.3 R29.2
GPIO4: JP16.2 R26.2
GPS_RX: JP11.1 R23.1
GPS_RX_J: JP6.3 U82.14
GPS_TX: JP11.2 R22.1
GPS_TX_J: JP6.4 U82.13
H_OUT1: C94.1 JP29.1 T1.3 T7.2 U90.9
H_OUT2: C98.1 JP30.1 T2.2 T3.3 U91.9
LED_BLUE: JP9.1 R37.2
LED_BLUE1: JP8.1 T5.B
LED_GREEN: JP9.3 R38.2
LED_GREEN1: JP8.2 T4.B
LED_RED: JP9.2 R39.2
MCLR: JP17.1 PIC32MZ.9 R17.1
N$1: D2.1 D5.2
N$2: D3.1 D4.2
N$3: R15.2 U3.3
N$4: R9.1 U1.51
N$5: R4.2 U4.P$3
N$6: R16.1 U$74.5
N$7: U5.2 U6.5
N$8: U5.3 U6.4
N$9: U2.2 U5.5
N$10: U2.3 U5.4
N$11: U6.2 U7.5
N$12: JP1.3 U1.16
N$13: JP1.2 U1.15
N$14: JP1.6 R1.2 U1.9
N$15: U26.2 U27.5
N$16: U6.3 U7.4
N$17: U7.2 U8.5
N$18: U7.3 U8.4
N$19: R3.1 U1.50
N$20: U8.2 U9.5
N$21: R6.1 U1.48
N$24: U8.3 U9.4
N$25: U9.2 U10.5
N$27: U9.3 U10.4
N$28: U10.2 U11.5
N$29: U10.3 U11.4
N$30: U11.2 U12.5
N$31: U11.3 U12.4
N$32: U12.2 U13.5
N$33: U12.3 U13.4
N$34: U13.2 U14.5
N$35: U13.3 U14.4
N$36: U14.2 U15.5
N$37: U14.3 U15.4
N$38: U15.2 U17.5
N$39: U15.3 U17.4
N$40: U16.5 U17.2
N$41: U16.4 U17.3
N$42: U18.2 U19.5
N$43: U18.3 U19.4
N$44: U16.2 U18.5
N$45: R5.1 U1.49
N$46: U16.3 U18.4
N$47: U19.2 U20.5
N$48: U19.3 U20.4
N$49: U20.2 U21.5
N$50: JP2.3 R2.2 U1.30
N$51: U20.3 U21.4
N$52: U21.2 U22.5
N$53: U21.3 U22.4
N$54: U22.2 U23.5
N$55: U22.3 U23.4
N$56: U23.2 U24.5
N$57: U23.3 U24.4
N$58: U24.2 U25.5
N$59: U24.3 U25.4
N$60: U25.2 U26.5
N$61: U25.3 U26.4
N$62: C20.1 FB1.1 U3.5
N$63: U26.3 U27.4
N$64: U27.2 U28.5
N$65: U27.3 U28.4
N$66: U28.2 U30.5
N$67: U28.3 U30.4
N$68: U29.5 U30.2
N$69: U29.4 U30.3
N$70: U31.2 U32.5
N$71: U31.3 U32.4
N$72: U29.2 U31.5
N$73: U29.3 U31.4
N$74: U32.2 U33.5
N$75: U32.3 U33.4
N$76: U33.2 U34.5
N$77: U33.3 U34.4
N$78: U34.2 U35.5
N$79: U34.3 U35.4
N$80: U35.2 U36.5
N$81: U35.3 U36.4
N$82: U36.2 U37.5
N$83: U36.3 U37.4
N$84: U37.2 U38.5
N$85: U37.3 U38.4
N$86: U38.2 U39.5
N$87: U38.3 U39.4
N$88: U39.2 U40.5
N$89: U39.3 U40.4
N$90: U40.2 U41.5
N$91: U40.3 U41.4
N$92: U1.23
N$93: U41.2 U43.5
N$94: U41.3 U43.4
N$95: U42.5 U43.2
N$96: U42.4 U43.3
N$97: U44.2 U45.5
N$98: U44.3 U45.4
N$99: U42.2 U44.5
N$100: U42.3 U44.4
N$101: U45.2 U46.5
N$102: U45.3 U46.4
N$103: U46.2 U47.5
N$104: U46.3 U47.4
N$105: U47.2 U48.5
N$106: U47.3 U48.4
N$107: U48.2 U49.5
N$108: U48.3 U49.4
N$109: U49.2 U50.5
N$110: U49.3 U50.4
N$111: U50.2 U51.5
N$112: C15.1 MPU6050.10
N$113: U50.3 U51.4
N$114: U51.2 U52.5
N$115: U51.3 U52.4
N$116: U52.2 U53.5
N$117: U52.3 U53.4
N$118: U53.2 U54.5
N$119: U53.3 U54.4
N$120: U54.2 U56.5
N$121: U54.3 U56.4
N$122: U55.5 U56.2
N$123: U55.4 U56.3
N$124: U57.2 U58.5
N$125: U57.3 U58.4
N$126: U55.2 U57.5
N$127: U55.3 U57.4
N$128: U58.2 U59.5
N$129: C16.1 L2.2 U$74.2
N$130: C16.2 U$74.6
N$131: U58.3 U59.4
N$132: U59.2 U60.5
N$133: U59.3 U60.4
N$134: U60.2 U61.5
N$135: U60.3 U61.4
N$136: U61.2 U62.5
N$137: U61.3 U62.4
N$138: U62.2 U63.5
N$139: U62.3 U63.4
N$140: U63.2 U64.5
N$141: U63.3 U64.4
N$142: U64.2 U65.5
N$143: U64.3 U65.4
N$144: U65.2 U66.5
N$145: U65.3 U66.4
N$146: U66.2 U67.5
N$147: U66.3 U67.4
N$148: U67.2 U69.5
N$149: U67.3 U69.4
N$150: U68.5 U69.2
N$151: U68.4 U69.3
N$152: U70.2 U71.5
N$153: U70.3 U71.4
N$154: U68.2 U70.5
N$155: U68.3 U70.4
N$156: U71.2 U72.5
N$157: U71.3 U72.4
N$158: U72.2 U73.5
N$159: U72.3 U73.4
N$160: U73.2 U74.5
N$161: U73.3 U74.4
N$162: U74.2 U75.5
N$163: U74.3 U75.4
N$164: U75.2 U76.5
N$165: U75.3 U76.4
N$166: C18.1 MPU6050.20
N$167: R11.1 U$74.4
N$168: R11.2 R12.1 R13.2
N$169: C29.1 HMC5883.8
N$170: C29.2 HMC5883.12
N$171: C31.1 HMC5883.10
N$172: C33.1 L1.2 U$2.2
N$173: C33.2 U$2.6
N$174: R7.1 U$2.4
N$175: R7.2 R8.1 R10.2
N$176: PIC32MZ.11 R18.1
N$177: PIC32MZ.13 R19.1
N$178: PIC32MZ.10 R20.1
N$179: PIC32MZ.14 R21.1
N$180: PIC32MZ.45 R22.2
N$181: PIC32MZ.44 R23.2
N$182: PIC32MZ.48 R24.2
N$183: PIC32MZ.47 R25.2
N$184: PIC32MZ.5 R29.1
N$185: PIC32MZ.6 R26.1
N$186: R31.1 T6.C
N$187: R32.1 T4.C
N$188: R30.1 T5.C
N$189: LED.5 R32.2
N$190: LED.6 R31.2
N$191: LED.4 R30.2
N$192: PIC32MZ.4 R27.1
N$193: PIC32MZ.1 R28.1
N$194: R33.1 U79.3
N$195: R34.1 U80.3
N$196: R36.1 U78.3
N$197: R35.1 U77.3
N$198: PIC32MZ.18 R37.1
N$199: PIC32MZ.29 R39.1
N$200: PIC32MZ.30 R38.1
N$201: JP8.3 T6.B
N$202: R40.1 U$2.5
N$205: C34.1 FB2.1 U77.5
N$206: R42.2 U82.7
N$207: LED1.A R42.1
N$208: JP4.4 SJ4.1
N$209: JP4.3 SJ2.1
N$210: JP5.3 SJ1.1
N$211: JP5.4 SJ3.1
N$212: C53.1 L3.2 U$1.2
N$213: C53.2 U$1.6
N$214: R45.1 U$1.4
N$215: R45.2 R46.1 R47.2
N$216: R48.1 U83.3
N$217: R49.1 U$1.5
N$218: C54.1 C60.2 E$3.3 U83.5
N$219: C63.1 L4.2 U$3.2
N$220: C63.2 U$3.6
N$221: R50.1 U$3.4
N$222: R50.2 R51.1 R52.2
N$223: R53.1 U84.3
N$224: R54.1 U$3.5
N$225: C64.1 C68.2 E$5.3 U84.5
N$272: R91.1 U90.6
N$273: R90.1 U90.10
N$274: C94.2 R92.2
N$275: R92.1 U90.1
N$276: R94.1 U91.6
N$277: R93.1 U91.10
N$278: C98.2 R95.2
N$279: R95.1 U91.1
PGC: JP17.5 PIC32MZ.15
PGD: JP17.4 PIC32MZ.16
S$1: R44.2 U91.3
S$2: R43.2 U90.3
S$3: E$1.3 R43.1
S$4: E$1.4 R44.1
SCL: HMC5883.1 JP3.2 JP7.1 MPU6050.23 MS5611.8 PIC32MZ.42 R14.1
SCL_J: JP12.2 U81.1 U82.12
SDA: HMC5883.16 JP3.1 JP7.2 MPU6050.24 MS5611.7 PIC32MZ.41 R41.1
SDA_J: JP12.1 U81.3 U82.9
SDI_1: R6.2 U2.4
V+: C36.1 C37.1 C40.1 U79.5 U81.4 XB2.1
VBUS: U1.33
VBUS1: PIC32MZ.33
VCC: C19.1 C21.1 C30.1 C32.1 C35.1 HMC5883.2 HMC5883.4 HMC5883.13 MPU6050.8 MPU6050.13 MS5611.1 MS5611.2 R14.2 R41.2 U78.5
VDD: C38.1 C39.1 C46.1 C47.1 U80.5 U82.2 U82.3 U82.17
XBEE_RX: JP11.3 R25.1
XBEE_RX_J: JP6.2 XB2.3
XBEE_TX: JP11.4 R24.1
XBEE_TX_J: JP6.1 XB2.2